# EAGLE board binary-clock (EAGLE 5.04)
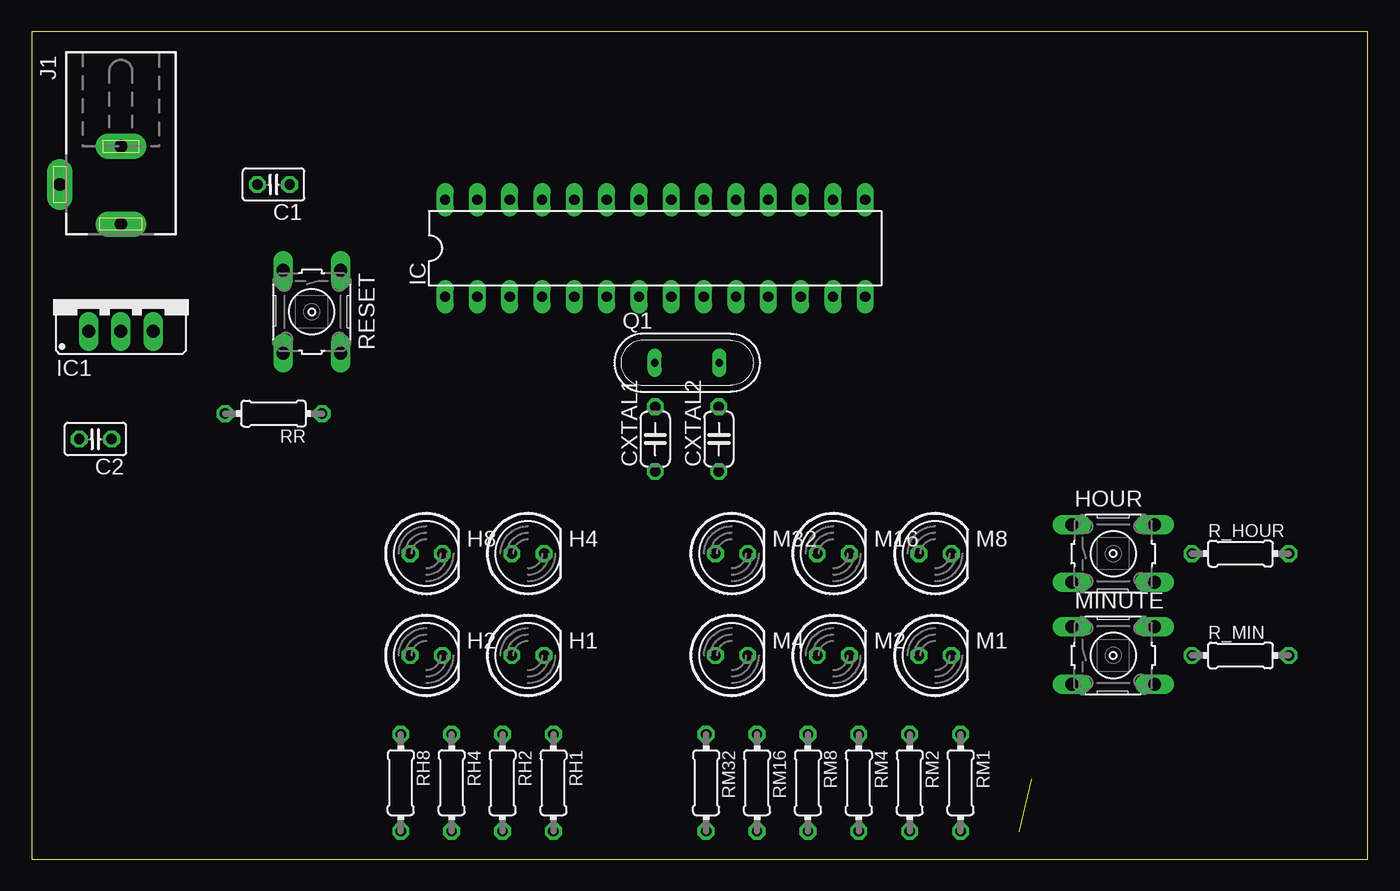
[diagram p0: board, top side]
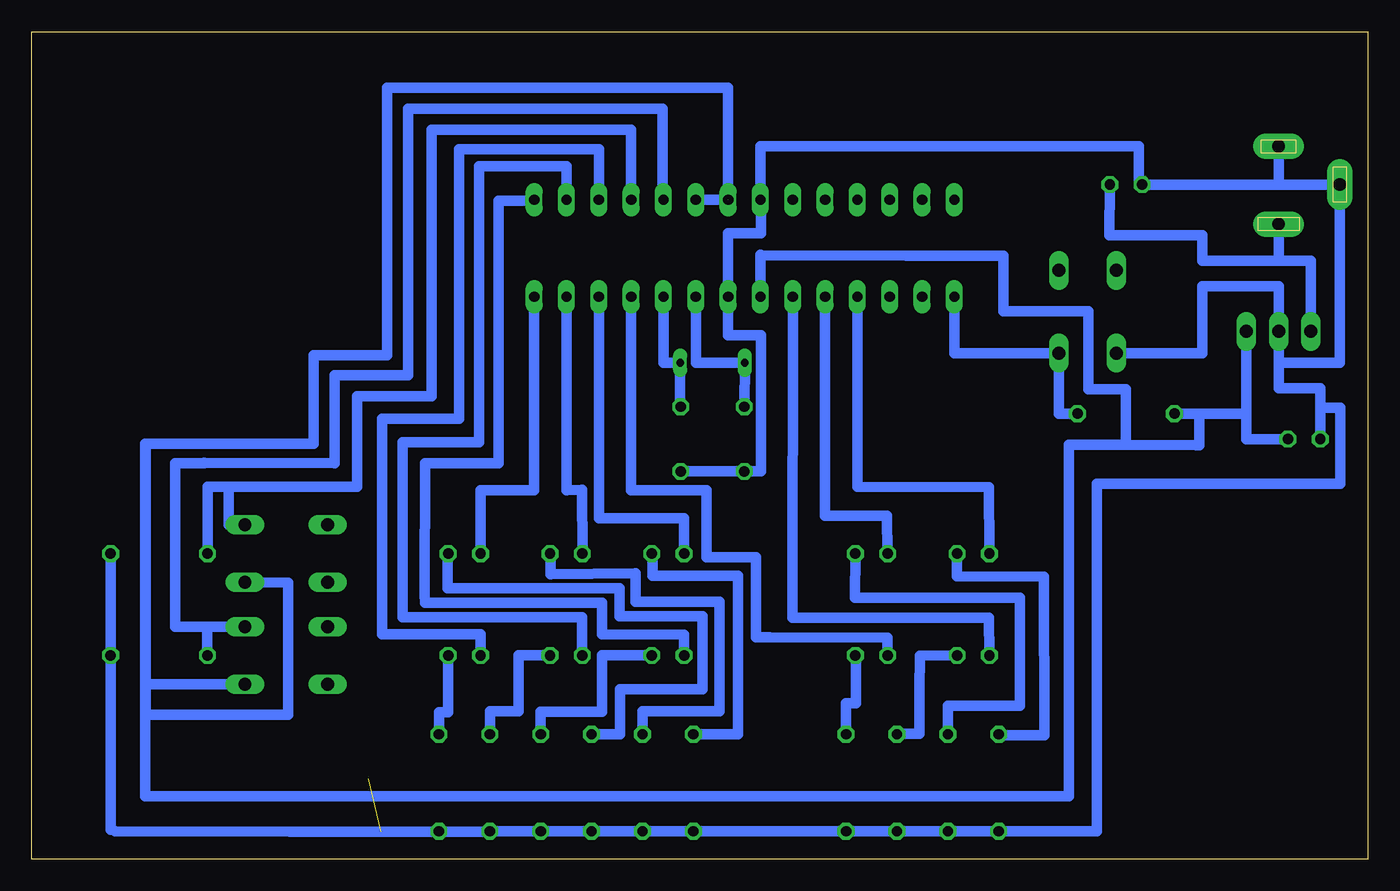
[diagram p1: board, bottom side, seen from below]

Size 105 x 65 mm. Coordinates in mm from the lower left corner, seen from the top.
Outline: 0,0 105,0 105,65 0,65 0,0
Copper layers (1*16): Top 0.035mm / dielectric 1.5mm / Bottom 0.035mm
Design rules "default": minimum track width 10mil, minimum drill 24mil, track to track 8mil, track to pad 8mil, pad to pad 8mil, via to via 8mil, smd to smd 8mil, copper to edge 40mil, drill to drill 8mil, minimum pad ring 10mil, minimum via ring 8mil, stop-mask expansion 4mil, vias tented up to drill 0mil, thermal gap 10mil

## Footprints (pad centres in the part's own frame; a part is rotated, then mirrored left to right if it is on the bottom)
C025-025X050 = drill 0.813 octagon: 1 -1.27,0; 2 1.27,0
C050-024X044 = drill 0.813 octagon: 1 -2.54,0; 2 2.54,0
LED5MM = drill 0.813 octagon: A -1.27,0; K 1.27,0
B3F-10XX = drill 1.016 long: 1 -3.251,2.261; 2 3.251,2.261; 3 -3.251,-2.261; 4 3.251,-2.261
DIL28-3 = drill 0.813 long: 1 -16.51,-3.81; 2 -13.97,-3.81; 3 -11.43,-3.81; 4 -8.89,-3.81; 5 -6.35,-3.81; 6 -3.81,-3.81; 7 -1.27,-3.81; 8 1.27,-3.81; 9 3.81,-3.81; 10 6.35,-3.81; 11 8.89,-3.81; 12 11.43,-3.81; 13 13.97,-3.81; 14 16.51,-3.81; 15 16.51,3.81; 16 13.97,3.81; 17 11.43,3.81; 18 8.89,3.81; 19 6.35,3.81; 20 3.81,3.81; 21 1.27,3.81; 22 -1.27,3.81; 23 -3.81,3.81; 24 -6.35,3.81; 25 -8.89,3.81; 26 -11.43,3.81; 27 -13.97,3.81; 28 -16.51,3.81
78XXS = drill 1.016 long: GND 0,-2.54; IN -2.54,-2.54; OUT 2.54,-2.54
DCJ0303 = drill 1 pad 2 long: 1 0,3.1; 2 4.8,0; 3 0,-3
QS = drill 0.61 long: 1 -2.54,0; 2 2.54,0
0204/7 = drill 0.813 octagon: 1 -3.81,0; 2 3.81,0

## Placement (x,y rotation side)
C1  10uF  [C025-025X050]  19,53 180 top
C2  10uF  [C025-025X050]  5,33 180 top
CXTAL1  22pF  [C050-024X044]  49,33 90 top
CXTAL2  22pF  [C050-024X044]  54,33 90 top
H1  [LED5MM]  39,16 0 top
H2  [LED5MM]  31,16 0 top
H4  [LED5MM]  39,24 0 top
H8  [LED5MM]  31,24 0 top
HOUR  [B3F-10XX]  85,24 0 top
IC  ATMEL ATMega328  [DIL28-3]  49,48 0 top
IC1  [78XXS]  7,44 0 top
J1  [DCJ0303]  7,53 180 top
M1  [LED5MM]  71,16 0 top
M2  [LED5MM]  63,16 0 top
M4  [LED5MM]  55,16 0 top
M8  [LED5MM]  71,24 0 top
M16  [LED5MM]  63,24 0 top
M32  [LED5MM]  55,24 0 top
MINUTE  [B3F-10XX]  85,16 0 top
Q1  [QS]  51.5,39 0 top
R_HOUR  10k  [0204/7]  95,24 0 top
R_MIN  10k  [0204/7]  95,16 0 top
RESET  [B3F-10XX]  22,43 270 top
RH1  220  [0204/7]  41,6 270 top
RH2  220  [0204/7]  37,6 270 top
RH4  220  [0204/7]  33,6 270 top
RH8  220  [0204/7]  29,6 270 top
RM1  220  [0204/7]  73,6 270 top
RM2  220  [0204/7]  69,6 270 top
RM4  220  [0204/7]  65,6 270 top
RM8  220  [0204/7]  61,6 270 top
RM16  220  [0204/7]  57,6 270 top
RM32  220  [0204/7]  53,6 270 top
RR  1k  [0204/7]  19,35 180 top

## Library data of the parts
C1 C2 CXTAL1 CXTAL2 R_HOUR R_MIN RH1 RH2 RH4 RH8 RM1 RM2 RM4 RM8 RM16 RM32 RR = rcl
H1 H2 H4 H8 M1 M2 M4 M8 M16 M32 = led
HOUR MINUTE RESET = switch-omron
IC = ic-package
IC1 = v-reg
J1 = con-jack
Q1 = special

## Nets
N$1: CXTAL1.2 IC.9 Q1.1
N$3: C1.1 IC1.IN J1.1
N$5: CXTAL2.2 IC.10 Q1.2
N$6: IC.1 RESET.2 RR.1
N$7: H1.K RH1.1
N$8: H8.K RH8.1
N$9: H4.K RH4.1
N$10: H2.K RH2.1
N$11: M1.K RM1.1
N$12: M32.K RM32.1
N$13: M16.K RM16.1
N$14: M8.K RM8.1
N$15: M4.K RM4.1
N$16: H8.A IC.4
N$17: H4.A IC.5
N$18: H2.A IC.6
N$19: H1.A IC.11
N$20: M2.K RM2.1
N$21: IC.12 M32.A
N$22: IC.13 M16.A
N$23: IC.14 M8.A
N$24: IC.15 M4.A
N$25: IC.16 M2.A
N$26: IC.17 M1.A
N$28: IC.19 MINUTE.2 R_MIN.1
N$29: HOUR.2 IC.18 R_HOUR.1
N$33: C1.2 C2.2 CXTAL1.1 CXTAL2.1 IC1.GND IC.8 IC.22 J1.2 J1.3 R_HOUR.2 R_MIN.2 RESET.4 RH1.2 RH2.2 RH4.2 RH8.2 RM1.2 RM2.2 RM4.2 RM8.2 RM16.2 RM32.2
N$34: C2.1 HOUR.4 IC1.OUT IC.7 IC.20 IC.21 MINUTE.4 RR.2

## Tracks (layer width: path | path; a pad name or v marks a point on that pad's centre or on a via)
N$1
  Bottom 0.813: CXTAL1.2 Q1.1 52.81,39 IC.9
N$3
  Bottom 0.813: 7,47 4.46,47 IC1.IN | 7,47 J1.1 | C1.1 20.3,49 13,49 13,47 7,47
N$5
  Bottom 0.813: CXTAL2.2 54.04,35.54 Q1.2 55.35,39 IC.10
N$6
  Bottom 0.813: RR.1 24.26,35 RESET.2 32.49,39.75 IC.1
N$7
  Bottom 0.813: H1.K 40.23,16 40.23,12.24 41,12.24 RH1.1
N$8
  Bottom 0.813: H8.K 32.28,22.21 25.46,22.18 25.42,9.74 29,9.74 RH8.1
N$9
  Bottom 0.813: H4.K 40.29,20.53 27.34,20.54 27.34,12.04 33,12.04 RH4.1
N$10
  Bottom 0.813: H2.K 35.21,15.99 35.23,13.28 35.23,9.84 37,9.84 RH2.1
N$11
  Bottom 0.813: M1.K 72.28,11.52 73,11.52 RM1.1
N$12
  Bottom 0.813: M32.K 56.23,24 56.23,22.28 49.49,22.28 49.49,9.82 RM32.1
N$13
  Bottom 0.813: M16.K 64.24,24 64.24,22.4 57.55,22.44 57.53,20.2 50.94,20.2 50.94,11.63 57,11.63 RM16.1
N$14
  Bottom 0.813: M8.K 72.31,24 72.31,21.3 58.82,21.29 58.82,19.09 52.28,19.09 52.28,13.36 58.77,13.36 58.77,9.82 RM8.1
N$15
  Bottom 0.813: M4.K 60.19,16 60.19,11.58 65,11.58 RM4.1
N$16
  Bottom 0.813: H8.A 29.75,24.1 29.76,29.23 40.11,29.24 IC.4
N$17
  Bottom 0.813: H4.A 37.77,26.98 42.65,26.98 IC.5
N$18
  Bottom 0.813: H2.A 29.72,16.02 29.76,18.96 43.65,18.97 45.2,18.97 45.2,19.2 IC.6
N$19
  Bottom 0.813: H1.A 37.74,17.41 47.14,17.44 | 47.01,17.44 47.14,17.44 | 47.14,17.44 48.07,17.44 48.07,23.7 51.96,23.7 51.95,28.99 57.92,28.99 IC.11
N$20
  Bottom 0.813: M2.K 66.75,16 66.75,11.6 69,11.6 RM2.1
N$21
  Bottom 0.813: M32.A 53.72,24.08 53.72,26.8 60.42,26.79 IC.12
N$22
  Bottom 0.813: M16.A 61.73,24.04 61.74,29.01 62.97,29 IC.13
N$23
  Bottom 0.813: M8.A 69.73,29 65.51,29 IC.14
N$24
  Bottom 0.813: M4.A 53.73,17.63 60.17,17.65 60.19,20.16 61.03,20.14 73.12,20.13 74.09,20.13 74.13,20.76 74.09,31.11 68.3,31.11 68.3,51.72 65.51,51.72 IC.15
N$25
  Bottom 0.813: M2.A 61.76,16 61.76,19 75.84,19 75.85,32.77 69.86,32.77 69.86,54.43 62.97,54.43 IC.16
N$26
  Bottom 0.813: M1.A 69.73,17.66 77.46,17.66 77.46,34.6 71.43,34.6 71.43,55.78 60.43,55.78 IC.17
N$28
  Bottom 0.813: IC.19 55.41,51.81 55.41,58.96 75.41,58.96 75.41,38 81.2,38 81.2,31.12 91.45,31.16 91.45,31.12 93.74,31.12 93.74,18.26 91.2,18.26 | 91.2,18.26 MINUTE.2 | R_MIN.1 91.2,18.26
N$29
  Bottom 0.813: IC.18 57.89,57.32 73.56,57.32 73.56,36.38 79.42,36.38 79.42,29.27 89.53,29.27 | HOUR.2 89.53,26.26 89.53,29.27 | 89.53,29.27 91.19,29.27 R_HOUR.1
N$33  (1 unrouted)
  Bottom 0.813: 7,53 J1.2 2.2,39 7,39 | 7,53 J1.3 | 7,53 C1.2 18,53 18,56 47.73,56 IC.22 47.7,51.81 47.7,49.19 50.27,49.19 IC.8 | 7,39 7,37 3.73,37 3.73,35.48 | 3.73,34.59 C2.2 | 3.73,35.48 3.73,34.59 | 7,39 IC1.GND | 7,39 7,45 13,45 13,39.75 RESET.4 | CXTAL2.1 CXTAL1.1 47.67,30.46 47.67,41.16 50.27,41.16 IC.8 | IC.8 | 3.73,34.59 3.73,34.65 | 73,2.15 84.7,2.15 98.43,2.17 98.81,2.3 R_MIN.2 R_HOUR.2 | 73,2.15 RM1.2 | 73,2.15 69,2.15 RM2.2 RM4.2 RM8.2 RM16.2 RM32.2 RH1.2 RH2.2 RH4.2 RH8.2 21.3,2.19 21.3,29.49 2.15,29.49 2.15,35.48 3.73,35.48
N$34  (1 unrouted)
  Bottom 0.813: C2.1 9.54,33 9.54,35 | 9.54,35 IC1.OUT | 13.25,35 RR.2 | 19.02,32.54 23.48,32.54 23.48,4.93 96.07,4.93 96.07,32.63 96.06,32.63 | 19.02,32.54 13.48,32.53 13.25,32.53 13.25,35 | 47.73,47.43 36.25,47.42 28.64,47.42 28.64,43.03 21.94,43.03 21.94,36.91 19.02,36.91 19.02,32.54 | 47.73,47.43 IC.7 | 50.31,51.81 IC.21 50.28,60.59 77.07,60.59 77.07,39.59 82.83,39.59 82.83,32.63 96.06,32.63 | 47.73,47.43 47.73,47.49 | 13.25,35 9.54,35 | IC.21 IC.20 | MINUTE.4 96.06,13.74 96.06,14.79 | 96.06,32.63 96.06,14.79 | HOUR.4 84.86,21.7 84.87,11.35 96.06,11.35 96.06,14.79